# Altium PCB GSH_Bed v1.0.PcbDoc (part 1 of 6)
Units mil, origin at the board's own origin, x right, y up, seen from the top; angles counter-clockwise.
Board outline 4724.41 x 4921.3 mil, 2 copper layers (Top Layer, Bottom Layer); 2 components, 3 nets, 5 pads, 0 vias.
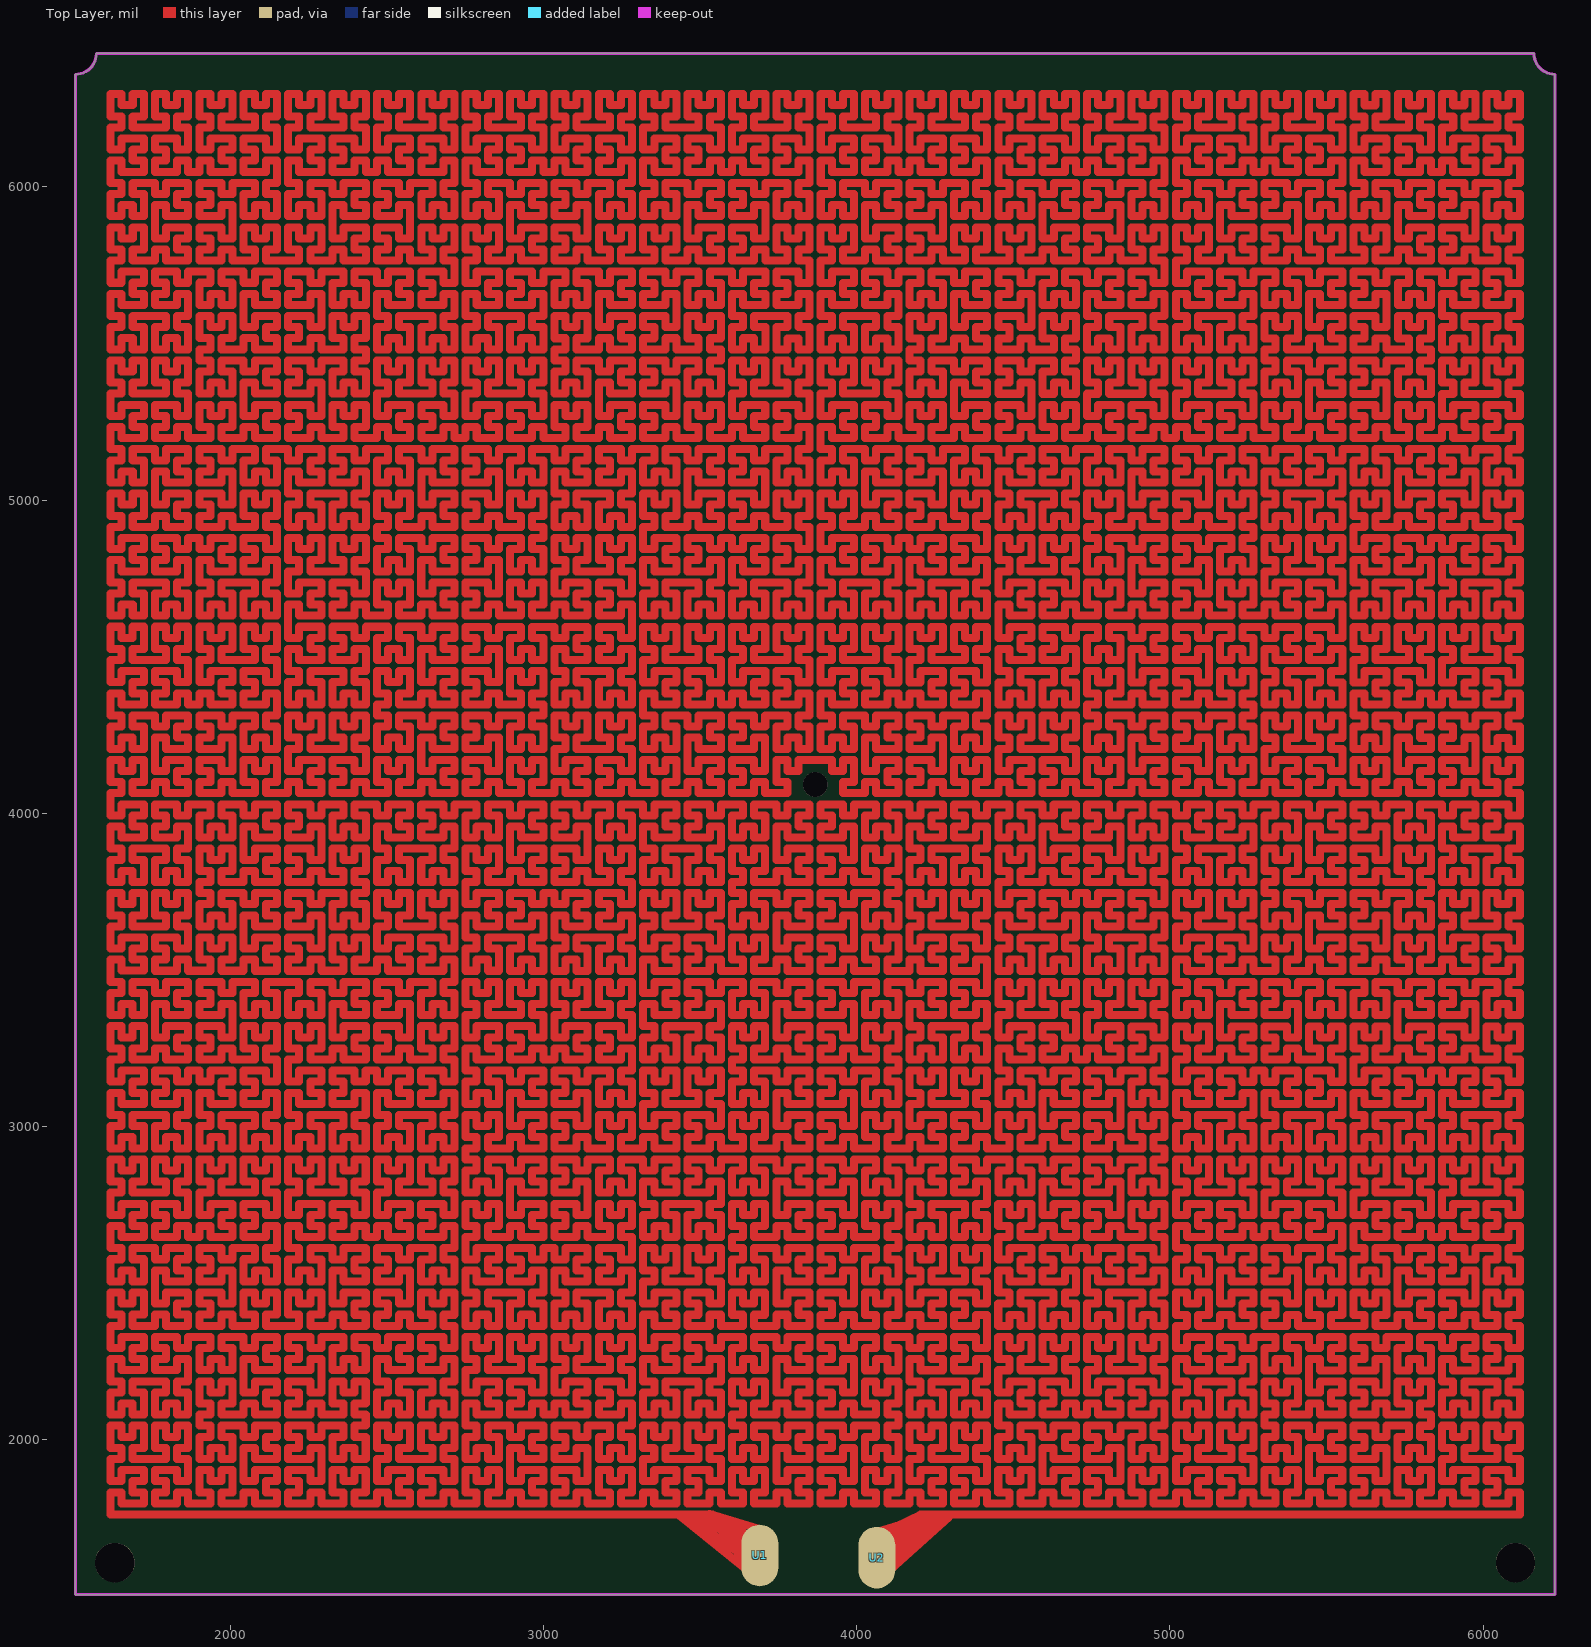
[diagram p0: Top Layer view]
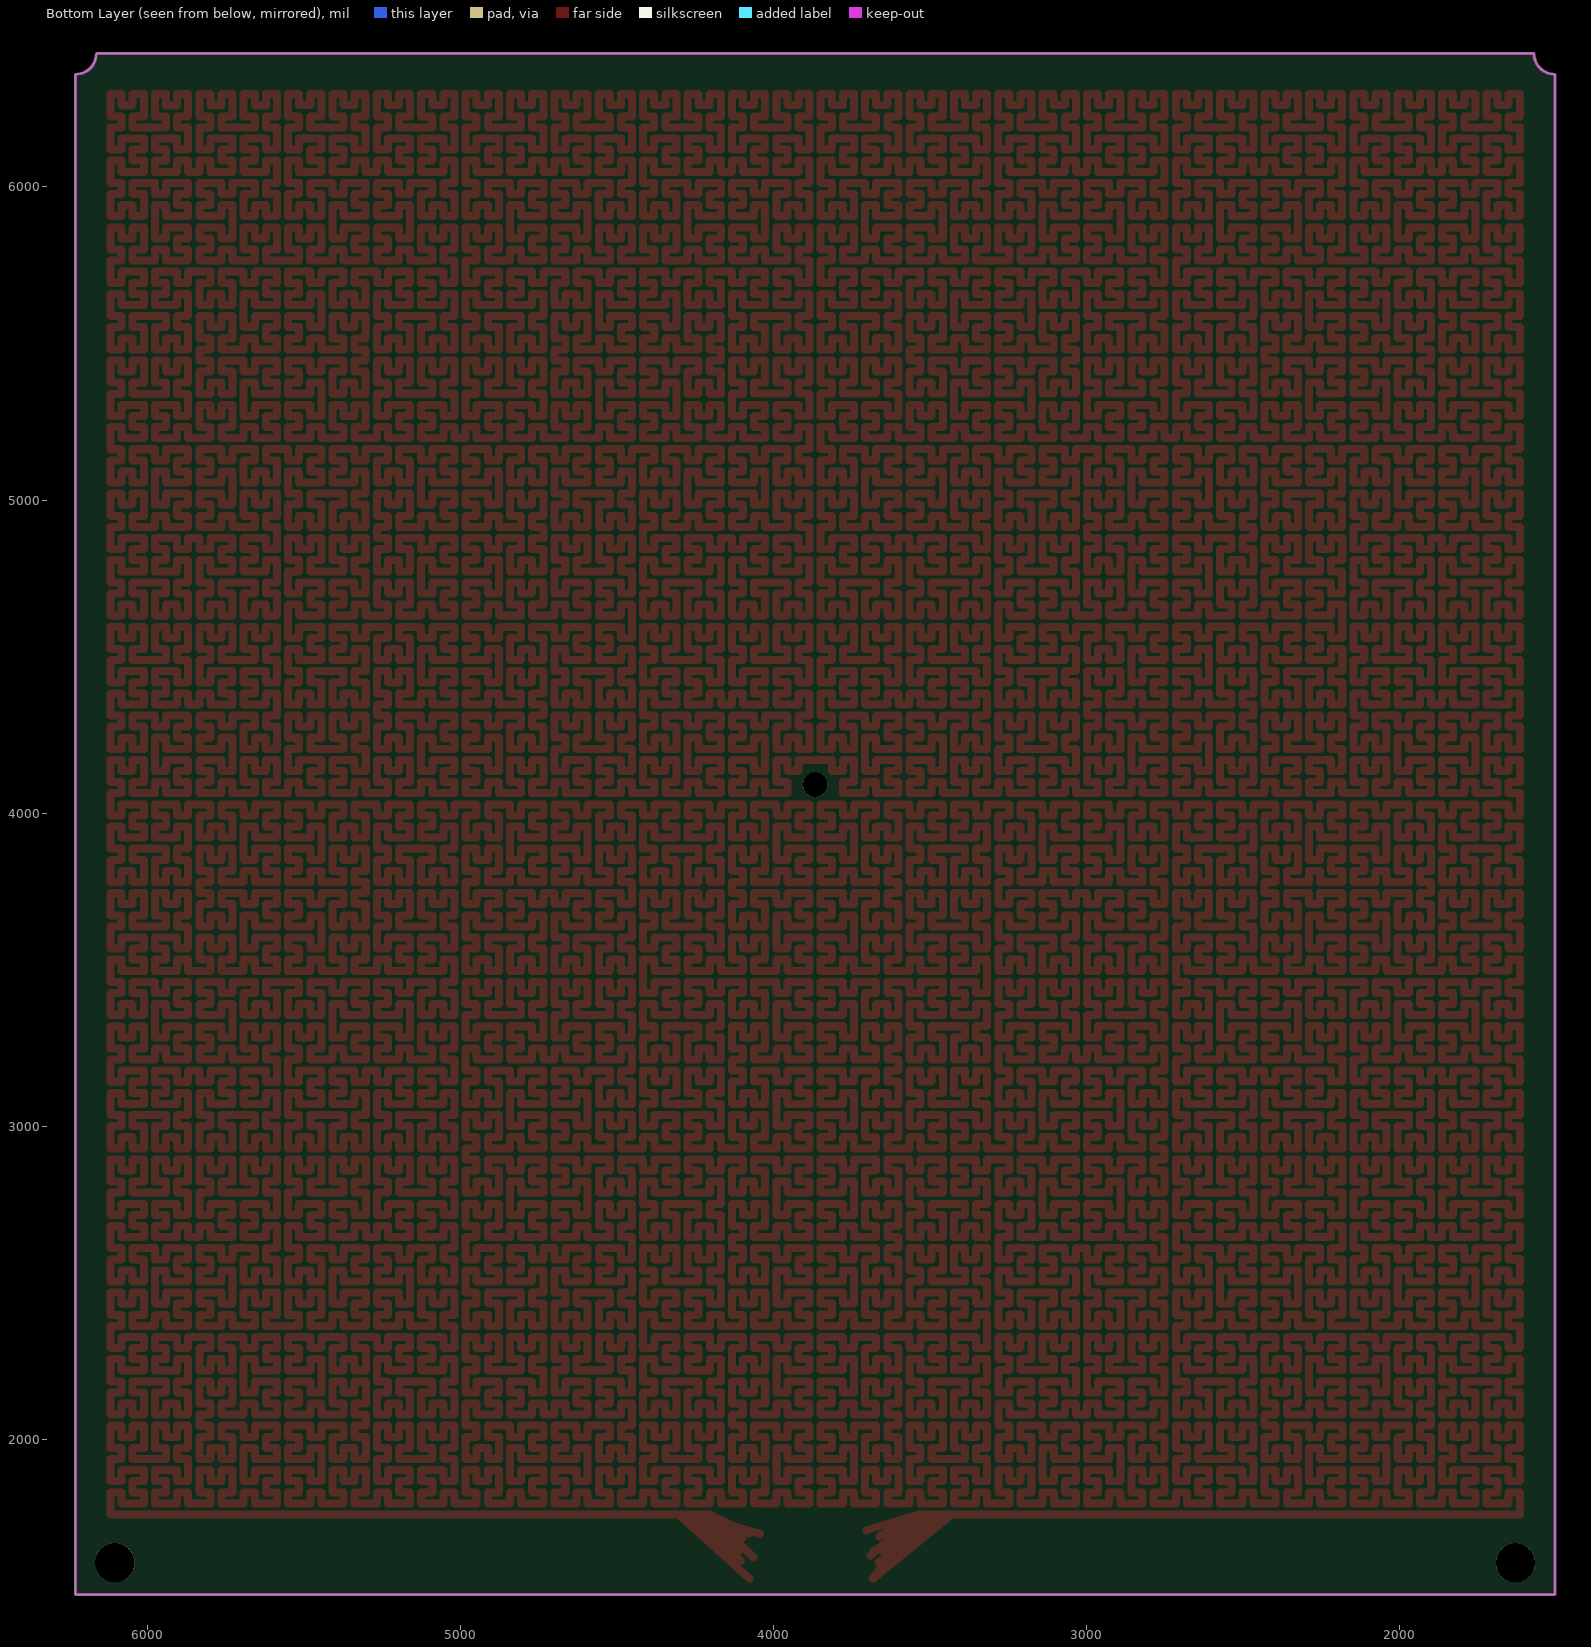
[diagram p1: Bottom Layer view, seen from below]

## Layer stack, top to bottom
Top Solder: solder mask 0.4, Solder Resist, Dk 3.5
Top Layer: signal copper 1.4
Dielectric1: dielectric 12.6, FR-4, Dk 4.8
Bottom Layer: signal copper 1.4
Bottom Solder: solder mask 0.4, Solder Resist, Dk 3.5

## Board outline
1505,1505 1505,6359.33 ccw(c1505,6426.26) 1571.93,6426.26 6162.5,6426.3 6162.48,6426.26 ccw(c6229.41,6426.26) 6229.41,6359.33 6229.4,1505

## Design rules (kind name [scope] priority, off if disabled: settings)
Clearance [All] p1: gap=10 ignorepadtopadclearanceinfootprint=FALSE except(0: Arc-Hole Track-Hole SMDPad-Hole THPad-Hole Via-Hole Fill-Hole Poly-Hole Region-Hole Text-Hole)
PolygonConnect [All] p1: connectstyle=Relief reliefconductorwidth=10 reliefentries=4 polygonreliefangle="90 Angle" airgapwidth=10
RoutingVias [All] p1: holewidth=28 width=50 viastyle="Through Hole" minholewidth=28 minwidth=50 maxholewidth=28 maxwidth=50
SolderMaskExpansion [All] p1: expansion=4 istentingtop=FALSE
Width [All] p1: maxlimit=10 minlimit=10 preferedwidth=10
30 further rules are at their usual default settings.

## Components (designator, comment, footprint, x,y, rotation, side; value= is the part's Value field where it differs from the comment)
U1 "3*5长圆焊盘" ? 3670.35,1625 r180 top
U2 "3*5长圆焊盘" ? 4044.06,1618.11 r180 top

## Footprints (in the part's own frame and the unit in brackets; to place one, negate y for a bottom-side part, rotate by r counter-clockwise, add the part's x,y. Pads: shape width x height; smd on the part's side, far side on the other; paste and mask are expansions set on the pad)
? [mil]
  oval 118.11x196.85 smd: 1(-20,-5)

## Free pads (board coordinates)
  round 125.98 hole 125.98 unplated: ""(1630.98,1607.36) ""(6103.43,1607.36)
  round 78.74 hole 78.74 unplated: ""(3867.21,4091.61)

## Nets (pads, with @x,y where several pads share a name; then routed paths per layer and width w, separated by ;. In a path a pad name is that pad's centre, name@x,y a point inside that pad or via, vN(x,y) a via of type N, cw(c..) or ccw(c..) an arc to the next point about the centre after c; other vN are vias at no path point)
S$8648: 
S$8987: U1.1 | length 3569.3
  Top Layer w25.59: 1617,1761 3538.7,1761 U1.1@3690.35,1630 ; 3433.11,1758.79 U1.1@3681.11,1557.79 ; 3463.11,1753.79 U1.1@3665.11,1607.79 ; 3488.11,1755.79 U1.1@3681.11,1643.79 ; 3530.56,1761.28 U1.1@3682.56,1556.28 ; 3530.56,1762.28 U1.1@3703.56,1710.28 ; 3563.56,1729.28 U1.1@3648.56,1642.28 ; 3577.56,1740.28 U1.1@3662.56,1691.28
S$8989: U2.1 | length 3179.7
  Top Layer w25.59: U2.1@4044.05,1699.35 4215.05,1751.35 ; U2.1@4064.06,1623.11 4204,1760.8 6117.1,1760.8 ; U2.1@4077,1556.4 4295,1753.4 ; U2.1@4079.05,1700.35 4208.05,1761.35 ; U2.1@4099.05,1687.35 4154.05,1722.35 ; U2.1@4105.05,1612.35 4268.05,1757.35 ; U2.1@4109.05,1644.35 4240.05,1755.35
copper on no net: | length 580219.6